# EAGLE board test_brd (EAGLE 9.5.2)
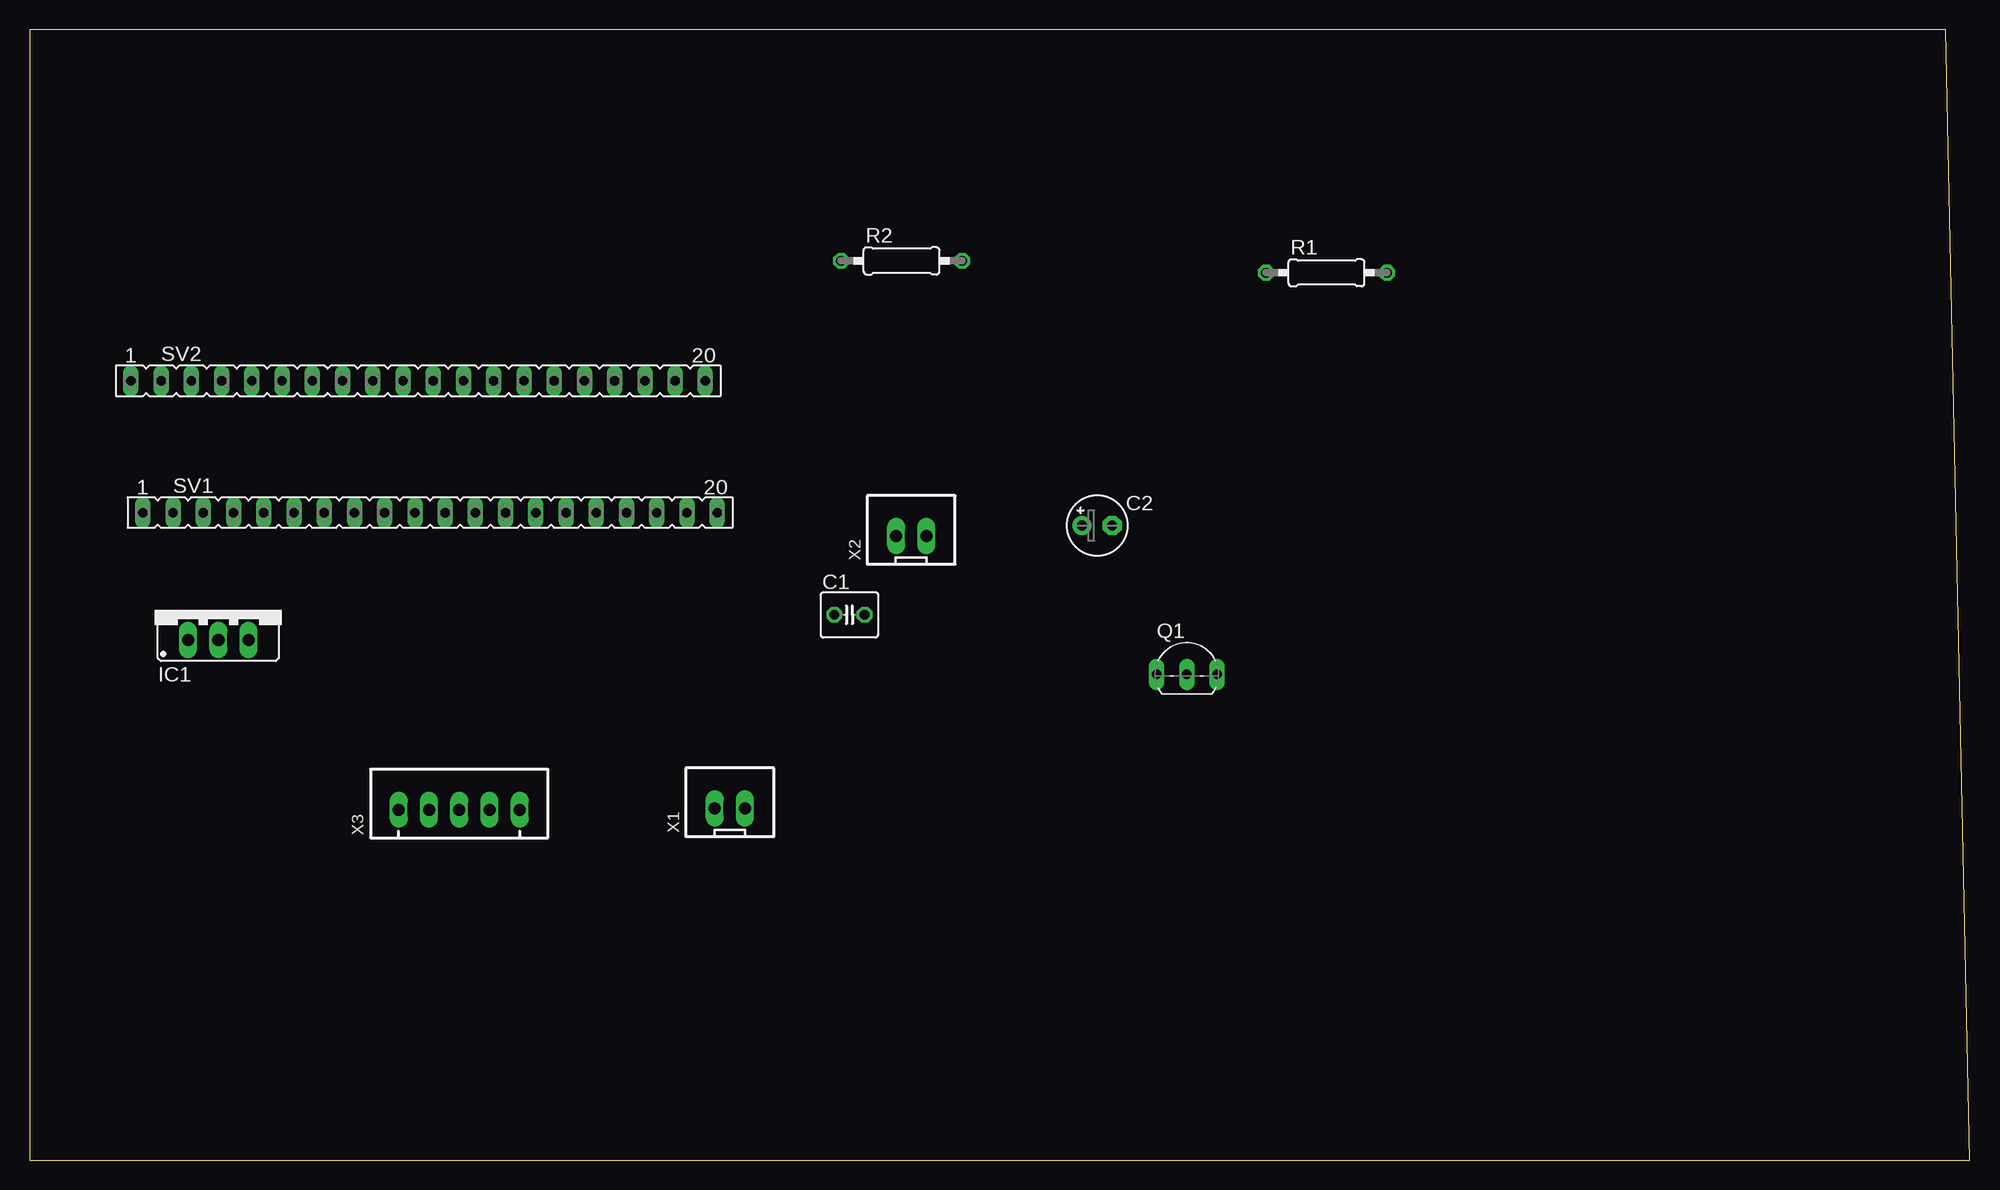
[diagram p0: board, top side]
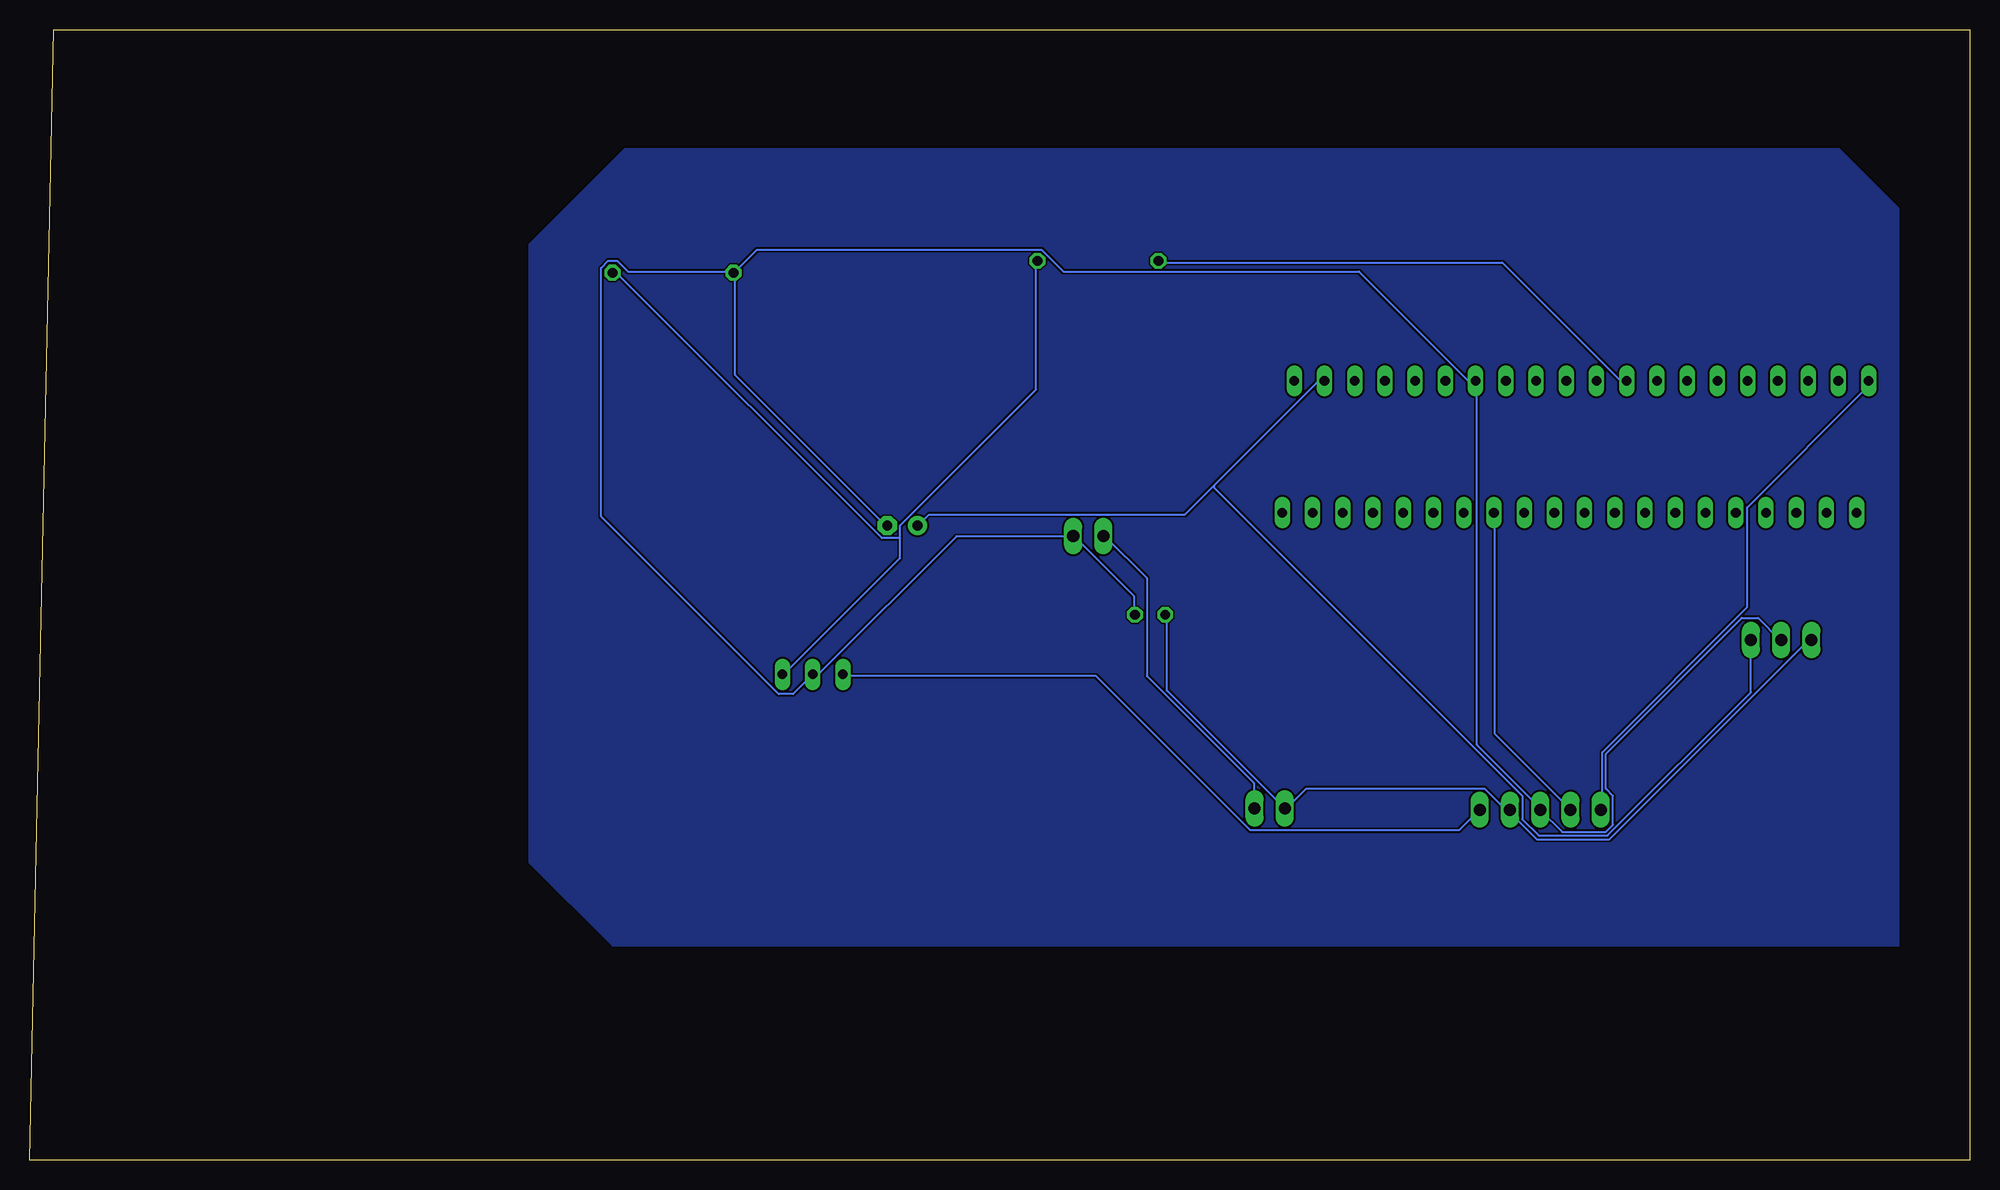
[diagram p1: board, bottom side, seen from below]

Size 163 x 95 mm. Coordinates in mm from the lower left corner, seen from the top.
Outline: 0,0 163,0 161,95 0,95 0,0
Copper layers (1*16): Top 0.035mm / dielectric 1.5mm / Bottom 0.035mm
Design rules "default": minimum track width 6mil, minimum drill 0.35mm, track to track 6mil, track to pad 6mil, pad to pad 6mil, via to via 6mil, smd to smd 6mil, copper to edge 40mil, drill to drill 6mil, minimum pad ring 10mil, minimum via ring 8mil, stop-mask expansion 4mil, vias tented up to drill 0mil, thermal gap 10mil

## Footprints (pad centres in the part's own frame; a part is rotated, then mirrored left to right if it is on the bottom)
C025-040X050 = drill 0.813 octagon: 1 -1.27,0; 2 1.27,0
E2,5-5 = drill 0.813 pad 1.6: + -1.27,0 | drill 0.813 pad 1.6 octagon: - 1.27,0
78XXS = drill 1.016 long: GND 0,-2.54; IN -2.54,-2.54; OUT 2.54,-2.54
TO92- = drill 0.813 long: 1 2.54,0; 2 0,0; 3 -2.54,0
0207/10 = drill 0.813 octagon: 1 -5.08,0; 2 5.08,0
FE20 = drill 0.813 long: 1 -24.13,0; 2 -21.59,0; 3 -19.05,0; 4 -16.51,0; 5 -13.97,0; 6 -11.43,0; 7 -8.89,0; 8 -6.35,0; 9 -3.81,0; 10 -1.27,0; 11 1.27,0; 12 3.81,0; 13 6.35,0; 14 8.89,0; 15 11.43,0; 16 13.97,0; 17 16.51,0; 18 19.05,0; 19 21.59,0; 20 24.13,0
ESP32-DEVKITC = drill 1 pad 1.93: 1 -22.87,-11.42; 2 -20.33,-11.42; 3 -17.79,-11.42; 4 -15.25,-11.42; 5 -12.71,-11.42; 6 -10.17,-11.42; 7 -7.63,-11.42; 8 -5.09,-11.42; 9 -2.55,-11.42; 10 -0.01,-11.42; 11 2.53,-11.42; 12 5.07,-11.42; 13 7.61,-11.42; 14 10.15,-11.42; 15 12.69,-11.42; 16 15.23,-11.42; 17 17.77,-11.42; 18 20.31,-11.42; 19 22.85,-11.42; 20 22.85,11.23; 21 20.31,11.23; 22 17.77,11.23; 23 15.23,11.23; 24 12.69,11.23; 25 10.15,11.23; 26 7.61,11.23; 27 5.07,11.23; 28 2.53,11.23; 29 -0.01,11.23; 30 -2.55,11.23; 31 -5.09,11.23; 32 -7.63,11.23; 33 -10.17,11.23; 34 -12.71,11.23; 35 -15.25,11.23; 36 -17.79,11.23; 37 -20.33,11.23; 38 -22.87,11.23
JST-XH-02-PACKAGE-LONG-PAD = drill 1.016 long: 1 -1.27,0; 2 1.27,0
JST-XH-05-PACKAGE-LONG-PAD = drill 1.016 long: 1 -5.08,0; 2 -2.54,0; 3 0,0; 4 2.54,0; 5 5.08,0

## Placement (x,y rotation side)
C1  0.1μF  [C025-040X050]  68.87,45.83 0 top
C2  3.3μF  [E2,5-5]  89.68,53.34 0 top
IC1  [78XXS]  15.85,46.26 0 top
Q1  2N5484  [TO92-]  97.22,40.83 0 top
R1  10kΩ  [0207/10]  108.95,74.58 0 top
R2  330Ω  [0207/10]  73.25,75.58 0 top
SV1  [FE20]  33.63,54.42 0 top
SV2  [FE20]  32.63,65.5 0 top
U$1  ESP32DEVKITC  [ESP32-DEVKITC]  -35.1,16.51 0 top  (outside the outline)
X1  JST-XH-02-PIN-LONG-PAD  [JST-XH-02-PACKAGE-LONG-PAD]  58.82,29.56 0 top
X2  JST-XH-02-PIN-LONG-PAD  [JST-XH-02-PACKAGE-LONG-PAD]  74.06,52.45 0 top
X3  JST-XH-05-PIN-LONG-PAD  [JST-XH-05-PACKAGE-LONG-PAD]  36.09,29.45 0 top

## Library data of the parts
C1 C2 R1 R2 = resistor
IC1 = v-reg
Q1 = transistor-fet
SV1 SV2 = con-lsta; OC_FARNELL: unknown; OC_NEWARK: unknown
U$1 = ESP32-DEVKITC
X1-X3 = Rembrandt Electronics - JST XH Connectors v1-0

## Nets
N$1: C1.1 IC1.IN X1.1 X3.4
N$2: C2.+ IC1.OUT SV2.19
N$3: C1.2 C2.- IC1.GND Q1.2 R1.1 SV2.14 X2.2 X3.3
N$4: Q1.1 R1.2 R2.2
N$5: R2.1 SV2.9
N$6: X1.2 X2.1
N$7: SV2.1 X3.1
N$8: SV1.13 X3.2
N$9: Q1.3 X3.5

## Tracks (layer width: path | path; a pad name or v marks a point on that pad's centre or on a via)
GROUND
  pour Bottom: 6,80 6,18 114,18 121,25 121,77 113,85 11,85
N$1
  Bottom 0.152: C1.1 67.47,45.72 67.47,39.47 X1.1 57.41,29.57 55.73,31.24 40.8,31.24 39.12,29.57 38.66,29.57 X3.4 38.51,29.41 38.51,29.11 36.38,26.98 30.28,26.98 13.67,43.59 13.36,43.59 IC1.IN
N$2
  Bottom 0.152: 63.5,56.69 65.94,54.25 87.43,54.25 88.34,53.34 C2.+ | 63.5,56.69 54.82,65.38 54.36,65.38 SV2.19 | 63.5,56.69 63.5,56.54 37.59,30.63 37.59,28.65 36.22,27.28 30.43,27.28 18.39,39.32 18.39,43.59 IC1.OUT
N$3
  Bottom 0.152: IC1.GND 15.95,43.74 17.78,45.57 19.15,45.57 30.58,34.14 30.58,31.24 29.98,30.63 29.98,28.19 30.58,27.58 34.24,27.58 36.07,29.41 X3.3 36.07,29.57 41.41,34.9 41.41,65.38 SV2.14 41.56,65.53 42.17,65.53 51.31,74.68 76.15,74.68 77.98,76.5 101.91,76.5 103.74,74.68 R1.1 | R1.1 103.74,74.52 103.74,65.99 91.09,53.34 C2.- | C1.2 70.21,45.87 70.21,47.4 75.24,52.43 X2.2 75.39,52.43 85.14,52.43 96.73,40.84 97.18,40.84 Q1.2 97.34,40.69 98.86,39.17 100.08,39.17 115.01,54.1 115.01,74.98 114.4,75.59 113.64,75.59 112.73,74.68 103.89,74.68 R1.1
N$4
  Bottom 0.152: 89.87,52.27 89.87,50.6 99.62,40.84 Q1.1 | 89.87,52.27 89.87,53.34 78.44,64.77 78.44,75.44 R2.2 | 89.87,52.27 91.39,52.27 113.64,74.52 113.95,74.52 R1.2
N$5
  Bottom 0.152: SV2.9 28.91,65.53 29.36,65.53 39.27,75.44 68.08,75.44 R2.1
N$6
  Bottom 0.152: X1.2 60.15,29.57 60.15,31.7 69.14,40.69 69.14,48.92 72.65,52.43 X2.1
N$7
  Bottom 0.152: SV2.1 8.64,65.38 8.64,64.92 18.7,54.86 18.7,46.48 30.89,34.29 30.89,29.57 X3.1
N$8
  Bottom 0.152: SV1.13 39.88,54.41 39.88,35.81 33.63,29.57 X3.2
N$9
  Bottom 0.152: Q1.3 94.59,40.69 73.41,40.69 60.45,27.74 42.93,27.74 41.25,29.41 X3.5